# Altium PCB power_board.PcbDoc
Units mil, origin at the board's own origin, x right, y up, seen from the top; angles counter-clockwise.
Board outline 1380.32 x 1202.16 mil, 2 copper layers (Top Layer, Bottom Layer); 51 components, 31 nets, 206 pads, 48 vias.
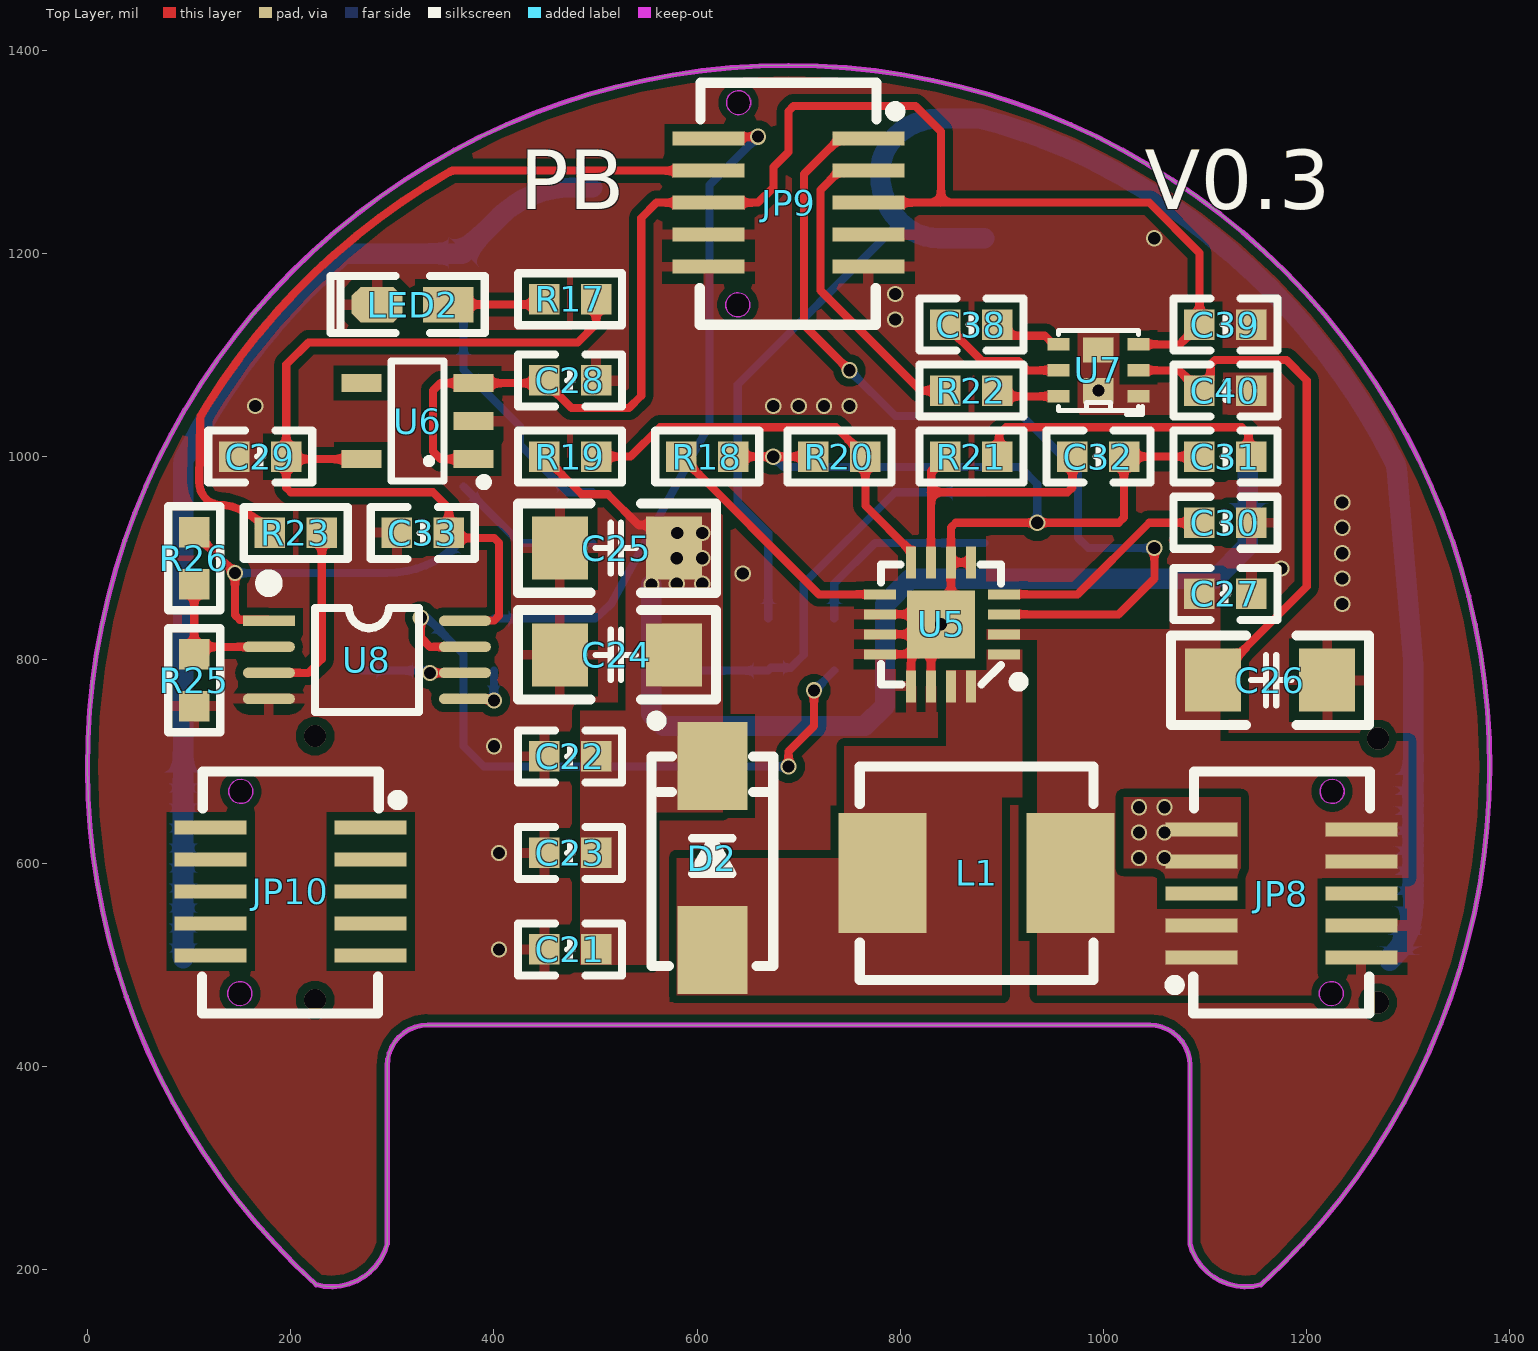
[diagram p0: Top Layer view]
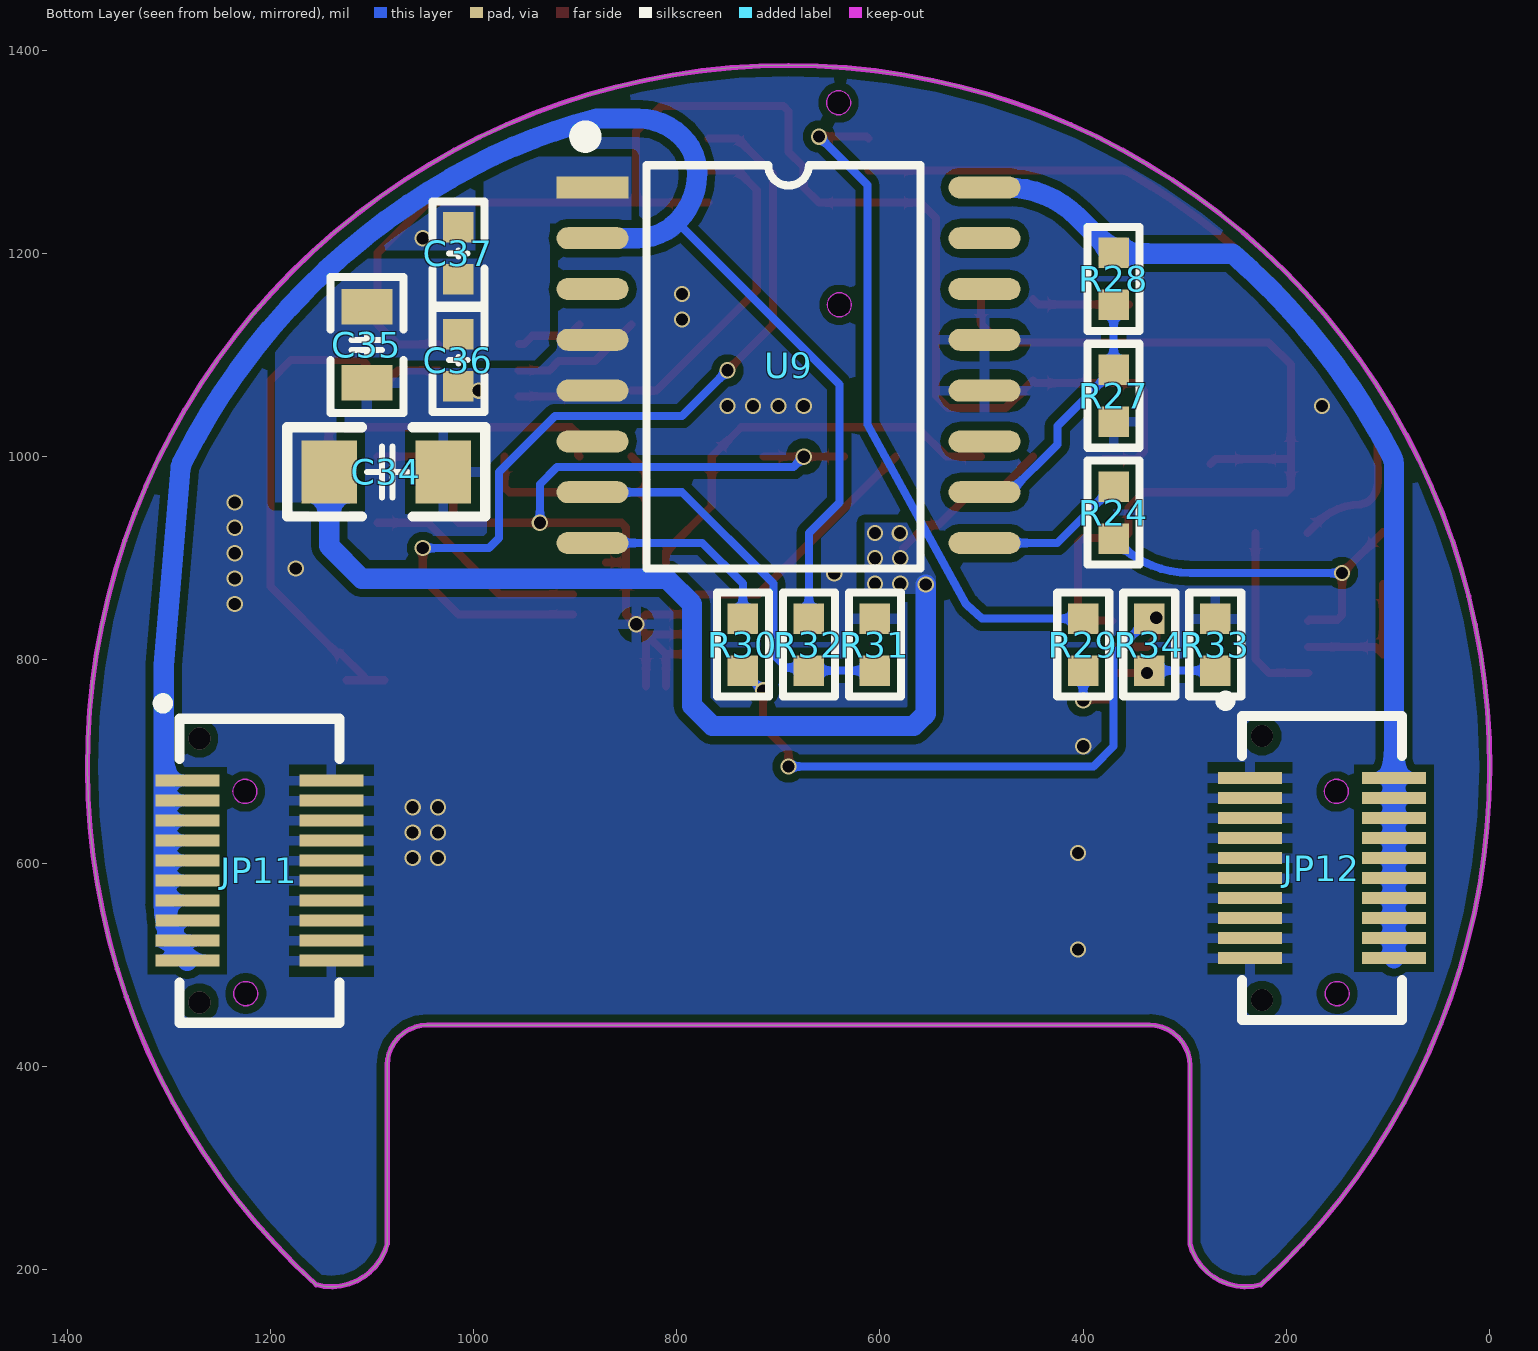
[diagram p1: Bottom Layer view, seen from below]
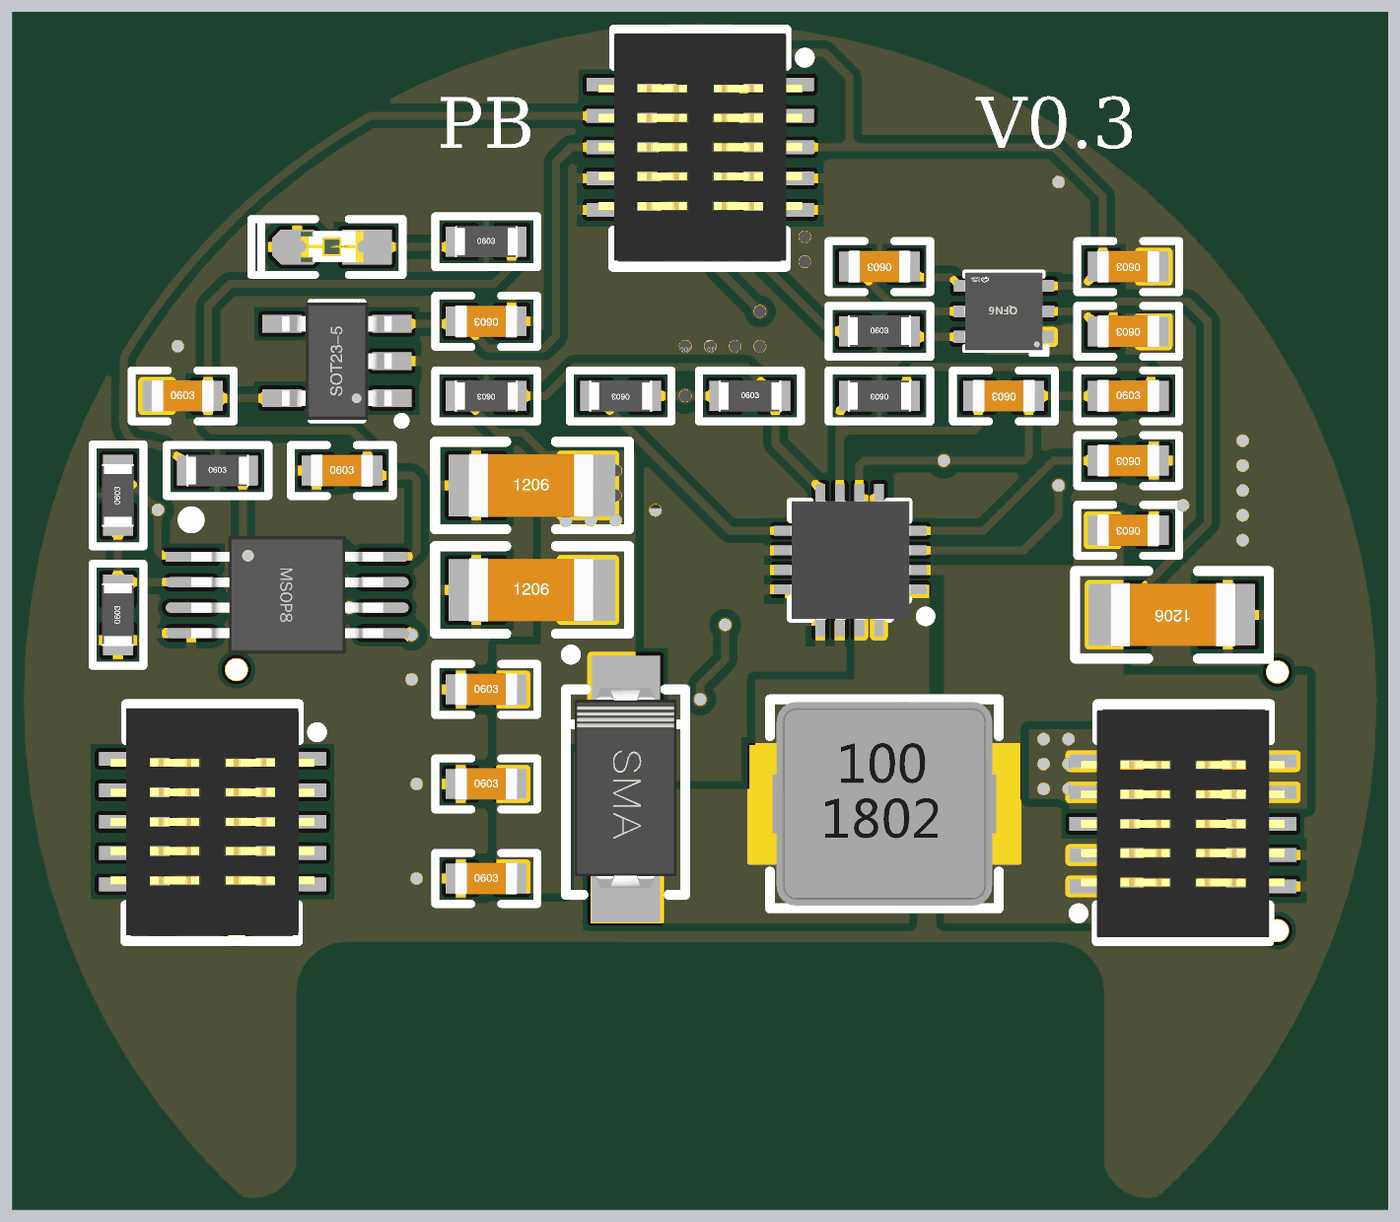
[diagram p2: 3D render of the assembled board from above, using the file's embedded part models]
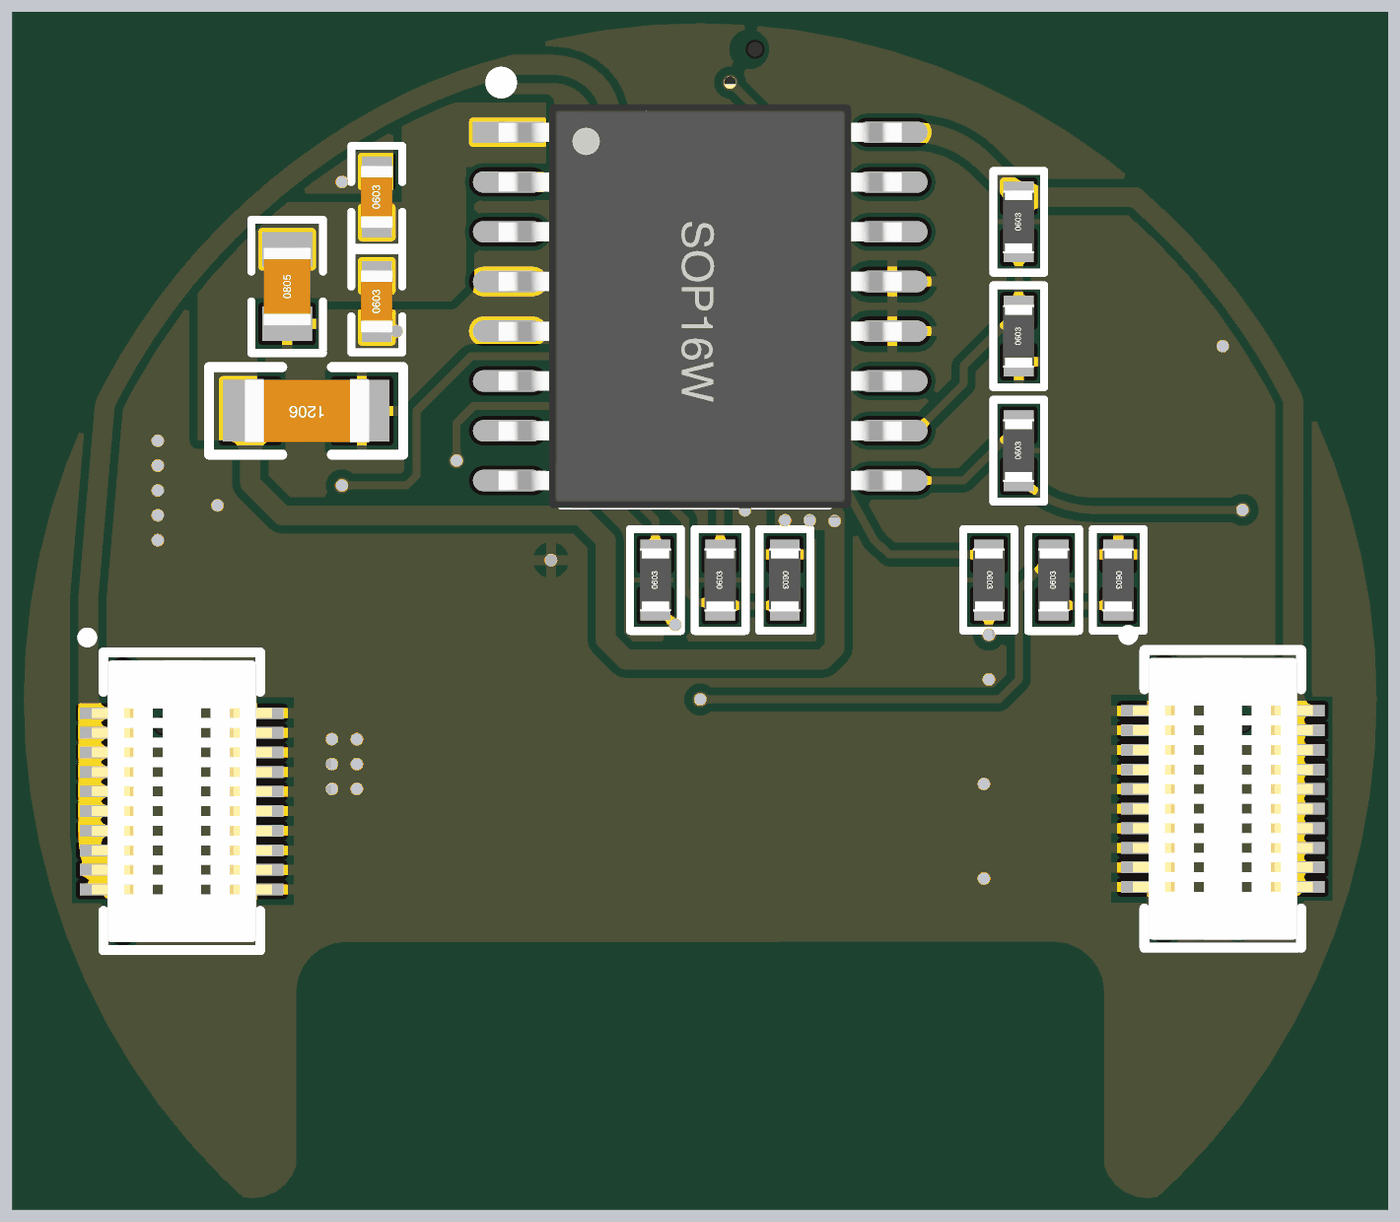
[diagram p3: 3D render of the assembled board from below, using the file's embedded part models]

## Layer stack, top to bottom
Top Solder: solder mask 0.4, Solder Resist, Dk 3.5
Top Layer: signal copper 1.4
Dielectric 1: dielectric 12.6, FR-4, Dk 4.8
Bottom Layer: signal copper 1.4
Bottom Solder: solder mask 0.4, Solder Resist, Dk 3.5

## Board outline
225,185 ccw(c240,240) 295,225 295,400.63 cw(c335,400.63) 335,440.63 1045.51,440.47 cw(c1045.51,400.98) 1085,400.98 1085,225 ccw(c1140,240) 1155,185 ccw(c690,695)

## Design rules (kind name [scope] priority, off if disabled: settings)
Clearance [All] p1: gap=8 ignorepadtopadclearanceinfootprint=FALSE except(0: Arc-Hole Track-Hole SMDPad-Hole THPad-Hole Via-Hole Fill-Hole Poly-Hole Region-Hole Text-Hole)
PolygonConnect [All] p1: connectstyle=Relief reliefconductorwidth=10 reliefentries=4 polygonreliefangle="90 Angle" airgapwidth=10
RoutingVias [All] p1: holewidth=28 width=50 viastyle="Through Hole" minholewidth=28 minwidth=50 maxholewidth=28 maxwidth=50
SolderMaskExpansion [All] p1: expansion=4 istentingtop=FALSE
Width [All] p1: maxlimit=20 minlimit=8 preferedwidth=8 minimp=50.000000 maximp=50.000000 favimp=50.000000
30 further rules are at their usual default settings.

## Components (designator, comment, footprint, x,y, rotation, side; value= is the part's Value field where it differs from the comment)
C21 "4.7uF" "C 0603_L" 475,515 r0 top
C22 "4.7uF" "C 0603_L" 475,705 r0 top
C23 "4.7uF" "C 0603_L" 475,610 r0 top
C24 "100uF" "C 1206_L" 520,805 r0 top
C25 "100uF" "C 1206_L" 520,910 r0 top
C26 "47uF" "C 1206_L" 1165,780 r180 top
C27 "0.1uF" "C 0603_L" 1120,865 r180 top
C28 "10uF" "C 0603_L" 475,1075 r180 top
C29 "10uF" "C 0603_L" 170,1000 r0 top
C30 "0.1uF" "C 0603_L" 1120,935 r180 top
C31 "0.1uF" "C 0603_L" 1120,1000 r0 top
C32 "0.1nF" "C 0603_L" 995,1000 r180 top
C33 "0.1uF" "C 0603_L" 330,925 r0 top
C34 "100uF" "C 1206_L" 1085,985 r0 bottom
C35 "10uF/50V" "C 0805_L" 1105,1110 r90 bottom
C36 "0.1uF" "C 0603_L" 1015,1095 r90 bottom
C37 "10nF" "C 0603_L" 1015,1200 r90 bottom
C38 "2.2uF/X7R" "C 0603_L" 870,1130 r180 top
C39 "2.2uF" "C 0603_L" 1120,1130 r180 top
C40 "4.7uF/X7R" "C 0603_L" 1120,1065 r180 top
D2 "SS110" SMA 615,605 r90 top
JP8 "Header 5*2" BTB-0.8mm-SMD-F-2*5PIN 1175,570 r90 top locked
JP9 "Header 5*2" BTB-0.8mm-SMD-F-2*5PIN 690,1250 r270 top locked
JP10 "Header 5*2" BTB-0.8mm-SMD-F-2*5PIN 200,572.08 r270 top locked
JP11 "Header 10*2" BTB-0.5MM-SMD-F_2*10PIN 1210.87,592.52 r180 bottom locked
JP12 "Header 10*2" BTB-0.5MM-SMD-F_2*10PIN 165,595 r180 bottom locked
L1 "2.2uH" 0530 875,590 r0 top
LED2 "红色" "LED 0603G" 320,1150 r180 top
R17 "10K" "R 0603_L" 475,1155 r0 top
R18 "40K" "R 0603_L" 610,1000 r180 top
R19 "100k" "R 0603_L" 475,1000 r180 top
R20 "4.02k" "R 0603_L" 740,1000 r0 top
R21 "2.55K" "R 0603_L" 870,1000 r180 top
R22 "100R" "R 0603_L" 870,1065 r0 top
R23 "100R" "R 0603_L" 205,925 r0 top
R24 "100R" "R 0603_L" 370,945 r90 bottom
R25 "10K" "R 0603_L" 105,780 r90 top
R26 "4.7K" "R 0603_L" 105,900 r90 top
R27 "10K" "R 0603_L" 370,1060 r90 bottom
R28 "53K" "R 0603_L" 370,1175 r90 bottom
R29 "100R" "R 0603_L" 400,815 r270 bottom
R30 "100R" "R 0603_L" 735,815 r90 bottom
R31 "10K" "R 0603_L" 605,815 r270 bottom
R32 "53K" "R 0603_L" 670,815 r90 bottom
R33 "10K" "R 0603_L" 270,815 r270 bottom
R34 "4.7K" "R 0603_L" 335,815 r90 bottom
U5 "TPS55340-EP" QFN16 840,835 r180 top
U6 "RS3236-SOT" SOT23-5L 325,1035 r90 top
U7 "TPS60150" WSON-6Pin 995,1085 r90 top
U8 "TP2412" MSOP8_L 275,800 r270 top
U9 "TCA0372" SOP16W_N 690,1090 r180 bottom

## Footprints (in the part's own frame and the unit in brackets; to place one, negate y for a bottom-side part, rotate by r counter-clockwise, add the part's x,y. Pads: shape width x height; smd on the part's side, far side on the other; paste and mask are expansions set on the pad)
0530 [mm]
  rect 2.2x3 smd paste-100 mask+0.05: 1(2.35,0) 2(-2.351,0)
  silkscreen extent -2.92,-2.67 2.92,2.67, body extent -2.85,-2.6 2.85,2.61, height 2.81
BTB-0.5MM-SMD-F_2*10PIN [mm] "0.5单槽板对板母座，H3.0-5.0，20PIN"
  rect 1.6x0.3 smd: 1(-1.8,2.25) 2(1.8,2.25) 3(-1.8,1.75) 4(1.8,1.75) 5(-1.8,1.25) 6(1.8,1.25) 7(-1.8,0.75) 8(1.8,0.75) 9(-1.8,0.25) 10(1.8,0.25) 11(-1.8,-0.25) 12(1.8,-0.25) 13(-1.8,-0.75) 14(1.8,-0.75) 15(-1.8,-1.25) 16(1.8,-1.25) 17(-1.8,-1.75) 18(1.8,-1.75) 19(-1.8,-2.25) 20(1.8,-2.25)
  silkscreen extent -2.54,-3.8 2,4.31, body extent -2.3,-3.6 2.3,3.6, height 2.3
BTB-0.8mm-SMD-F-2*5PIN [mm] "0.8双槽插板对板母座，10PIN"
  rect 0.35x1.8 smd: 1(-1.6,2) 2(-1.6,-2) 3(-0.8,2) 4(-0.8,-2) 5(0,2) 6(0,-2) 7(0.8,2) 8(0.8,-2) 9(1.6,2) 10(1.6,-2)
  Keep-Out Layer board cut-out: -2.2,-1.25 -2.2,-1.31 -2.246,-1.42 -2.33,-1.504 -2.44,-1.55 -2.56,-1.55 -2.67,-1.504 -2.754,-1.42 -2.8,-1.31 -2.8,-1.25 -2.8,-1.19 -2.754,-1.08 -2.67,-0.996 -2.56,-0.95 -2.44,-0.95 -2.33,-0.996 -2.246,-1.08 -2.2,-1.19 -2.2,-1.25 -2.2,-1.25
  Keep-Out Layer board cut-out: 2.853,-1.27 2.853,-1.33 2.807,-1.44 2.723,-1.524 2.613,-1.57 2.493,-1.57 2.383,-1.524 2.299,-1.44 2.253,-1.33 2.253,-1.27 2.253,-1.21 2.299,-1.1 2.383,-1.016 2.493,-0.97 2.613,-0.97 2.723,-1.016 2.807,-1.1 2.853,-1.21 2.853,-1.27 2.853,-1.27
  Keep-Out Layer circle w0.025: c-2.5,-1.25 r0.3
  Keep-Out Layer circle w0.025: c2.553,-1.27 r0.3
  Keep-Out Layer region: -2.2,-1.25 -2.2,-1.31 -2.246,-1.42 -2.33,-1.504 -2.44,-1.55 -2.56,-1.55 -2.67,-1.504 -2.754,-1.42 -2.8,-1.31 -2.8,-1.25 -2.8,-1.19 -2.754,-1.08 -2.67,-0.996 -2.56,-0.95 -2.44,-0.95 -2.33,-0.996 -2.246,-1.08 -2.2,-1.19 -2.2,-1.25 -2.2,-1.25
  Keep-Out Layer region: 2.853,-1.27 2.853,-1.33 2.807,-1.44 2.723,-1.524 2.613,-1.57 2.493,-1.57 2.383,-1.524 2.299,-1.44 2.253,-1.33 2.253,-1.27 2.253,-1.21 2.299,-1.1 2.383,-1.016 2.493,-0.97 2.613,-0.97 2.723,-1.016 2.807,-1.1 2.853,-1.21 2.853,-1.27 2.853,-1.27
  silkscreen extent -3,-2.22 3.05,2.79, body extent -2.9,-2.6 2.9,2.6, height 3.9
"C 0603_L" [mil] "无极性贴片电容                                       淘宝ID:黄晶宝石"
  rect 30x30 smd: 1(-25.59,0) 2(25.59,0)
  silkscreen extent -51,-26 51,26, body extent -31,-16 31,16, height 32
"C 0805_L" [mil] "无极性贴片电容                                        淘宝ID:黄晶宝石"
  rect 35x50 smd: 1(-37.4,0) 2(37.4,0)
  silkscreen extent -67,-36 67,36, body extent -39,-24 39,24, height 20
"C 1206_L" [mil] "无极性贴片电容"
  rect 55x62 smd: 1(-55.12,0) 2(57.09,0)
  silkscreen extent -96,-44 98,44, body extent -63,-32 63,32, height 48
"LED 0603G" [mil] "绿色0603LED                                   淘宝ID:黄晶宝石"
  rect 50x35 smd: 1(-35,0.26)
  oct 50x35 smd: 2(35,0.26)
  silkscreen extent -71,-28 81,28, body extent -31,-16 32,16, height 18
MSOP8_L [mm] "塑封体长3mm，宽3mm，脚距0.65          淘宝ID:黄晶宝石"
  rect 0.26x1.3 smd: 1(-0.975,-2.45)
  oval 0.26x1.3 smd: 2(-0.325,-2.45) 3(0.325,-2.45) 4(0.975,-2.45) 5(0.975,2.45) 6(0.325,2.45) 7(-0.325,2.45) 8(-0.975,2.45)
  silkscreen extent -2.07,-2.6 1.3,1.3, body extent -1.5,-2.45 1.5,2.45, height 0.95
QFN16 [mm] "3mm*3mm 封装库来自淘宝卖家 ID：黄晶宝石"
  rect 0.8x0.25 smd: 1(-1.575,0.75) 2(-1.575,0.25) 3(-1.575,-0.25) 4(-1.575,-0.75) 9(1.524,-0.75) 10(1.524,-0.25) 11(1.524,0.25) 12(1.524,0.75)
  rect 0.25x0.8 smd: 5(-0.75,-1.55) 6(-0.25,-1.55) 7(0.25,-1.55) 8(0.75,-1.55) 13(0.75,1.55) 14(0.25,1.55) 15(-0.25,1.55) 16(-0.75,1.55)
  rect 1.7x1.7 smd: 17(0,0)
  silkscreen extent -2.07,-1.5 1.5,1.56, body extent -1.55,-1.52 1.49,1.52, height 0.9
"R 0603_L" [mil] "1/10W贴片电阻                 淘宝ID:黄晶宝石"
  rect 30x30 smd: 1(-25.59,0) 2(25.59,0)
  silkscreen extent -51,-26 51,26, body extent -31,-16 32,16, height 16
SMA [mm] "4.5x2.6*2.2mm（长宽高，不包括引脚）"
  rect 2.2x1.75 smd: 1(-2.3,0) 2(2.3,0)
  silkscreen extent -2.7,-1.52 3.56,1.52, body extent -2.53,-1.3 2.58,1.3, height 2.15
SOP16W_N [mm] "10.3*10.3*2.6mm（长宽高）"
  rect 1.8x0.55 smd: 1(-4.9,4.445)
  oval 1.8x0.55 smd: 2(-4.9,3.175) 3(-4.9,1.905) 4(-4.9,0.635) 5(-4.9,-0.635) 6(-4.9,-1.905) 7(-4.9,-3.175) 8(-4.9,-4.445) 9(4.9,-4.445) 10(4.9,-3.175) 11(4.9,-1.905) 12(4.9,-0.635) 13(4.9,0.635) 14(4.9,1.905) 15(4.9,3.175) 16(4.9,4.445)
  silkscreen extent -5.23,-5.08 3.3,5.87, body extent -5.15,-5.15 5.15,5.15, height 2.7
SOT23-5L [mm] "3x1.6x1.1mm(长宽高) 封装库来自淘宝卖家 ID：黄晶宝石"
  rect 0.45x1 smd: 1(-0.95,-1.4) 2(0,-1.4) 3(0.95,-1.4) 4(0.95,1.4) 5(-0.95,1.4)
  silkscreen extent -1.6,-1.73 1.5,0.66, body extent -1.5,-1.4 1.5,1.4, height 1.15
WSON-6Pin [mil]
  rect 12x22.01 smd: 1(-25.59,-39.37) 2(0,-39.37) 3(25.59,-39.37) 4(25.59,39.37) 5(0,39.37) 6(-25.59,39.37)
  rect 25x30 smd: 7(-20,0) 7(20,0)
  silkscreen extent -43,-43 39,39, body extent -39,-39 39,39, height 33

## Part data
C21 C22 C23 C24 C25 C26 C27 C28 C29 C30 C31 C32 C33 C34 C35 C36 C37 C38 C39 C40: library part C, "贴片电容", BOM名称=无极性贴片电容, 淘宝ID="封装库来自淘宝 ID：黄晶宝石", 联系售后=https://shop463601444.taobao.com
D2: library part SS14, "肖特基二极管", BOM名称=肖特基二极管, 封装库来自淘宝 ID：黄晶宝石=https://shop463601444.taobao.com, 属性=40V/1A
JP8 JP9 JP10 JP11 JP12: "BTB Connector"
L1: library part L-, "一体成型电感", BOM名称=一体成型电感, 淘宝ID="封装库来自淘宝 ID：黄晶宝石", 联系售后=https://shop463601444.taobao.com
LED2: library part LED-SMD, "贴片LED", BOM名称=贴片LED, 学习资源=https://shop463601444.taobao.com, 版权归属="封装库来自淘宝 ID：黄晶宝石"
R17 R18 R19 R20 R21 R22 R23 R24 R25 R26 R27 R28 R29 R30 R31 R32 R33 R34: library part R, "贴片电阻", BOM名称=贴片电阻, 版权归属="来自淘宝 ID：黄晶宝石", 联系售后=https://shop463601444.taobao.com
U5: "增强型集成式 5A、40V 宽输入范围升压/SEPIC/反激式直流/直流稳压器"
U6: "500mA LDO"
U7: "采用2*2SON封装的140mA、5V电荷泵"
U8: "10MHz Bandwidth, Low Noise Precision Op‐amps"

## Via types
v1: diameter 16, hole 12, Top Layer to Bottom Layer, tented both sides, 44 vias
v2: diameter 21.65, hole 21.65, Top Layer to Bottom Layer, 4 vias

## Nets (pads, with @x,y where several pads share a name; then routed paths per layer and width w, separated by ;. In a path a pad name is that pad's centre, name@x,y a point inside that pad or via, vN(x,y) a via of type N, cw(c..) or ccw(c..) an arc to the next point about the centre after c; other vN are vias at no path point)
+5: C29.2 C33.2 R17.2 U6.5 U8.8 | length 902.9
  Top Layer w8: U6.5@274.74,992.74 U6.5 197.99,997.6 C29.2 ; U8.8 371.88,838.81 400.31,838.81 405,843.5 405,915.31 400.31,920 360.58,920 C33.2 355.59,949.41 340,965 200,965 195.59,969.41 C29.2 ; R17.2 500.59,1130.59 482.5,1112.5 217.5,1112.5 195.59,1090.59 C29.2
AGND: C21.1 C22.1 C23.1 C24.1 C25.1 C26.1 C27.1 C28.1 C29.1 C30.1 C31.1 C32.1 C33.1 C34.1 C35.1 C36.1 C37.2 C39.1 C40.1 JP8.2 JP8.4 JP8.7 JP8.9 JP9.7 JP9.8 JP9.9 JP9.10 JP11.2 JP11.4 JP11.6 JP11.8 JP11.10 JP11.12 JP11.14 JP11.16 JP11.18 JP11.20 JP12.1 JP12.3 JP12.5 JP12.7 JP12.9 JP12.11 JP12.13 JP12.15 JP12.17 JP12.19 LED2.2 R18.1 R20.1 R25.1 R27.1 R31.1 R33.1 U5.5 U5.6 U5.10 U5.11 U5.12 U5.13 U5.14 U5.17 U6.2 U7.1 U7.7 U8.4 U9.4 U9.5 U9.12 U9.13 | length 1084.2
  Top Layer w8: R18.1 v1(675,1000) R20.1 ; U5.12 780.06,805.54 U5.17@810.54,805.54 ; U5.11 U5.17@830.16,825.16 ; U5.10 830.16,844.84 v1(840,835) ; U5.13 810.47,805.47 U5.17@810.54,805.54 ; U5.14 U5.17@830.16,825.16 ; U5.5 U5.6 ; C31.1 C32.1 1020,999.41 1020,940 1015,935 v1(934.76,935) 854.53,935 849.84,930.31 U5.6 ; U5.17@810.54,805.54 U5.17@830.16,825.16 ; U5.17@830.16,825.16 v1(840,835) ; v1(840,835) 849.84,844.84 U5.6
  Bottom Layer w8: v1(675,1000) 685.17,989.83 917.8,989.83 934.76,972.87 v1(934.76,935)
  other v1: 405,515 1035,605 1060,605 405,610 1035,630 1060,630 1035,655 1060,655 400,715 1235,855 1235,880 645,885 1175,890 1235,905 1235,930 1235,955 165,1050 675,1050 700,1050 725,1050 750,1050 995,1065 795,1135 795,1160 1050,1215
Boost_EN: JP9.1 U5.3 | length 892.6
  Top Layer w8: v1(750,1085) 705.31,1129.69 705.31,1278.1 740.2,1312.99 JP9.1 ; U5.3 1014.84,844.84 1050,880 v1(1050,910)
  Bottom Layer w8: v1(750,1085) 795,1040 920,1040 975,985 975,920 985,910 v1(1050,910)
CP_EN: JP9.3 R22.1 | length 318.2
  Top Layer w8: JP9.3 740.2,1281.49 721.31,1262.6 721.31,1163.69 820,1065 R22.1
NetC30_2: C30.2 U5.4 | length 221.6
  Top Layer w8: U5.4 974.53,864.53 1045,935 C30.2
NetC31_2: C31.2 R21.1 | length 297.5
  Top Layer w8: R21.1 897.32,1001.73 897.32,1022.32 904,1029 1136,1029 1142.69,1022.31 1142.69,1002.89 C31.2
NetC32_2: C32.2 R21.2 U5.7 | length 281.4
  Top Layer w8: U5.7 830.16,965 ; R21.2 830.16,985.75 830.16,965 ; C32.2 969.41,969.69 964.73,965 830.16,965
NetC38_1: C38.1 U7.4 | length 67.5
  Top Layer w8: C38.1 906.59,1119 942.21,1119 950.19,1111.03 U7.4@955.19,1111.03
NetC38_2: C38.2 U7.5 | length 129.9
  Top Layer w8: C38.2 880.42,1094 916.39,1094 925.38,1085 U7.5
NetD2_1: D2.1 L1.2 U5.1 U5.15 U5.16
NetLED2_1: LED2.1 R17.1 | length 96.6
  Top Layer w8: LED2.1 444.15,1149.74 R17.1
NetR18_2: R18.2 U5.9 | length 251.7
  Top Layer w8: R18.2 719.89,864.53 U5.9
NetR19_1: R19.1 R20.2 U5.8 | length 411.6
  Top Layer w8: R19.1 534.61,1000 563.61,1029 736.58,1029 R20.2 765.59,951.72 810.47,906.83 U5.8
NetR22_2: R22.2 U7.6 | length 62.4
  Top Layer w8: R22.2 901.17,1059.41 U7.6
NetR23_2: R23.2 U8.3 | length 182
  Top Layer w8: U8.3 217.2,787.2 230.59,800.59 R23.2
NetR24_2: R24.2 U9.9 | length 150.1
  Bottom Layer w8: R24.2 425.58,915 U9.9
NetR25_2: R25.2 R26.1 U8.2 | length 145.3
  Top Layer w8: R26.1 R25.2 112.21,812.8 U8.2
NetR27_2: R27.2 R28.1 U9.10 | length 251.5
  Bottom Layer w8: R28.1 R27.2 425.43,1030.15 425.43,1012.05 472.48,965 U9.10
NetR29_2: R29.2 U8.5 | length 58.6
  Top Layer w8: U8.5 371.88,761.19 398.82,761.19 v1(400,760)
  Bottom Layer w8: v1(400,760) R29.2
NetR30_2: R30.2 U9.8 | length 198.9
  Bottom Layer w8: R30.2 735,875 775,915 U9.8
NetR31_2: R31.2 R32.1 U9.7 | length 391.6
  Bottom Layer w8: R31.2 R32.1 672.9,792.31 692.31,792.31 705,805 705,875 795,965 U9.7
NetR33_2: R33.2 R34.1 U8.6 | length 102.4
  Top Layer w8: v1@335,789.41 v1(337.2,787.2) U8.6
  Bottom Layer w8: R33.2 R34.1
PZT_A1: R24.1 R26.2 U8.1 | length 368.4
  Top Layer w8: R26.2 v1(145.18,885.41) 145.18,844.19 149.87,839.5 177.43,839.5 U8.1
  Bottom Layer w8: v1(145.18,885.41) 294.58,885.41 ccw(c294.58,985.41) 365.29,914.7 R24.1
PZT_B1: R30.1 R34.2 U8.7 | length 655.8
  Top Layer w8: v1(328.08,841.54) 328.08,821.92 337.2,812.8 U8.7 ; v1(690,695) 690,710 715,735 v1(715,770)
  Bottom Layer w8: v1(328.08,841.54) 334.04,841.54 R34.2 370,805.58 370,715 390,695 v1(690,695) ; v1(715,770) 720,775 720.59,775 R30.1
PZT_IN_A: JP9.4 R23.1 | length 758.8
  Top Layer w8: R23.1 169.04,935.36 ccw(c126.57,892.88) 126.57,952.95 ccw(c120,940.59) 122.58,954.35 cw(c124.11,962.2) 118.49,956.51 117.07,957.93 cw(c134.14,975) 110,975 110.99,1037.31 cw(c118.99,1037.13) 112.1,1041.2 cw(c690,695) 118.17,1051.14 cw(c690,695) 356.76,1280.47 cw(c360.68,1273.49) 360.64,1281.49 JP9.4
PZT_IN_B: JP9.2 R29.1 | length 675.1
  Top Layer w8: JP9.2 613.27,1315 v1(660,1315)
  Bottom Layer w8: R29.1 499.59,840.59 514.14,853.74 514.29,853.87 514.43,854.02 515.24,854.82 612.3,1031.76 612.3,1267.3 v1(660,1315)
PZT_OUT_A: JP12.2 JP12.4 JP12.6 JP12.8 JP12.10 JP12.12 JP12.14 JP12.16 JP12.18 JP12.20 R28.2 U9.16 | length 1016.2
  Bottom Layer w20: JP12.20 JP12.18 JP12.16 JP12.14 JP12.12 JP12.10 JP12.8 JP12.6 JP12.4 JP12.2 94.13,992.79 cw(c114.08,991.28) 96.26,1000.36 cw(c690,695) 123.71,1048.69 cw(c140.63,1038.02) 123.89,1048.95 136.21,1067.94 cw(c153.02,1057.1) 136.4,1068.23 cw(c690,695) 253.1,1199.87 368.25,1199.87 ccw(c368.25,1202.33) R28.2 405.12,1235.71 cw(c475.83,1165) 475.83,1265 U9.16
PZT_OUT_B: JP11.1 JP11.3 JP11.5 JP11.7 JP11.9 JP11.11 JP11.13 JP11.15 JP11.17 JP11.19 R32.2 U9.2 | length 1781.9
  Bottom Layer w8: R32.2 670,925 640,955 640,1071.06 799.84,1230.91
  Bottom Layer w20: U9.2 838.28,1215 cw(c838.28,1269.39) 799.84,1230.91 cw(c847.68,1278.79) 780,1278.86 cw(c831.21,1278.79) 794.99,1314.99 cw(c838.04,1271.94) 838.04,1332.82 878.28,1332.82 cw(c735.45,773.94) 980.75,1296.03 cw(c972.24,1277.93) 980.94,1295.94 cw(c690,695) 1063.56,1248.38 cw(c1052.33,1231.82) 1063.67,1248.3 1063.78,1248.23 cw(c690,695) 1286.47,994.99 cw(c1268.56,986.09) 1288.49,987.74 1305,795 1305,560.11 cw(c1225.56,560.11) JP11.19
VBAT: C26.2 C27.2 C40.2 JP8.1 JP8.3 JP8.8 JP8.10 L1.1 U5.2 U7.2 | length 575.6
  Top Layer w8: U7.2 1074.42,1085 C40.2 1105.41,1076 1105.41,1090.73 1109.69,1095 1180,1095 1200,1075 1200,872.09 1134.91,807 1131.41,807 1107.91,783.5 C26.2 ; C26.2@1087.83,780 C26.2 ; C26.2@1125,780 C26.2
VCP: C28.2 C39.2 JP9.5 JP9.6 U6.1 U6.3 U7.3 | length 1444.4
  Top Layer w8: U6.1 347.4,997.6 340,1005 340,1065 347.4,1072.4 U6.3 446.81,1072.4 C28.2 476.41,1048 533,1048 545,1060 545,1235 560,1250 JP9.6 660,1250 675,1265 675,1285 690,1300 690,1340 695,1345 815,1345 840,1320 840,1250 ; JP9.5 840,1250 ; U7.3 1075,1110.59 C39.2 1094.41,1200.59 1045,1250 840,1250
VPZT: C21.2 C22.2 C23.2 C24.2 C25.2 C34.2 C35.2 C36.2 C37.1 D2.2 R19.2 U9.1 | length 1089.2
  Top Layer w8: R19.2 486.41,963 512,963 542.27,932.73 554.36,932.73 C25.2
  Bottom Layer w20: v1(555,874.22) 555,746.72 560.86,740.86 566.72,735 765,735 785,755 785,855 810,880 1110,880 1142.09,912.09 C34.2
  other v1: 580,875 605,875 580,900 605,900 580.44,924.76 605,925
pads on no net: JP8.5 JP8.6 JP10.1 JP10.2 JP10.3 JP10.4 JP10.5 JP10.6 JP10.7 JP10.8 JP10.9 JP10.10 U6.4 U9.3 U9.6 U9.11 U9.14 U9.15
copper on no net:
  other v2: 1269.92,462.6 224.06,465.08 1269.92,722.44 224.06,724.92

## Polygon pours and split planes (outlines as drawn)
VBAT on Top Layer "VBAT_L01_P002" (solid, pour order 2): 885,830 885,820 935,820 935,470 1215,470 1215,585 1300,585 1300,720 1115,720 1115,885 1065,885 1065,830
AGND on Top Layer "AGND_L01_P009" (solid, pour order 9): 225,185 ccw(c240,240) 295,225 295,400.63 cw(c335,400.63) 335,440.63 1045.51,440.47 cw(c1045.51,400.98) 1085,400.98 1085,225 ccw(c1140,240) 1155,185 ccw(c690,695)
VPZT on Top Layer "VPZT_L01_P005" (solid, pour order 5): 530,945 530,750 485,750 485,500 555,500 555,650 625,650 625,945
NetD2_1 on Top Layer "NETD2_1_L01_P004" (solid, pour order 4): 580,470 580,605 900,605 900,470
NetD2_1 on Top Layer "NETD2_1_L01_P003" (solid, pour order 3): 885,810 920,810 920,665 900,665 900,470 745,470 745,715 845,715 845,790 885,790
AGND on Top Layer "AGND_L01_P000" (solid, pour order 0): 1135,595 1020,595 1020,665 1135,665
AGND on Bottom Layer "AGND_L02_P010" (solid, pour order 10): 225,185 ccw(c240,240) 295,225 295,400.63 cw(c335,400.63) 335,440.63 1045.51,440.47 cw(c1045.51,400.98) 1085,400.98 1085,225 ccw(c1140,240) 1155,185 ccw(c690,695)
VPZT on Bottom Layer "VPZT_L02_P007" (solid, pour order 7): 845,1295 845,1230 925,1230 925,1110 940,1095 1135,1095 1135,955 1195,955 1195,1121.88 1145,1175 1125,1195 990,1195 990,1295
VPZT on Bottom Layer "VPZT_L02_P008" (solid, pour order 8): 545,882.5 573.64,935 615,935 615,865 545,865

## Keep-outs
Keep-Out Layer:
  the board outline again, w5

## Other copper
Top Layer:
  pour cut-out: 845,880 845,945 1005,945 1005,1015 1110,1015 1110,985 1025,985 1025,940 1010,925 875,925 875,880
  pour cut-out: 620,1015 620,985 730,985 730,1015
Bottom Layer:
  pour cut-out: 665,1010 665,995 680,980 910,980 925,965 925,925 945,925 945,980 925,1000 695,1000 690,1005 690,1010

## Silkscreen, mask and mechanical layers (free items; w line width, h text height)
Top Overlay:
  text "PB                    V0.3" at 425.27,1224.29 h100
Mechanical 1:
  the board outline again, w5
Mechanical 15:
  circle w5: c785,695 r787.4
  circle w5: c590,705 r590.55
  lines w5: 295,154.45 ccw(c346.18,154.45) 346.18,103.27 1033.82,103.27 ccw(c1033.82,154.45) 1085,154.45 1085,400.43 ccw(c1045.51,400.43) 1045.51,439.92 335,440.08 ccw(c335,400.08) 295,400.08 295,154.45